# EAGLE board picoBuck-Panel-v10 (EAGLE 6.4), part 1 of 2
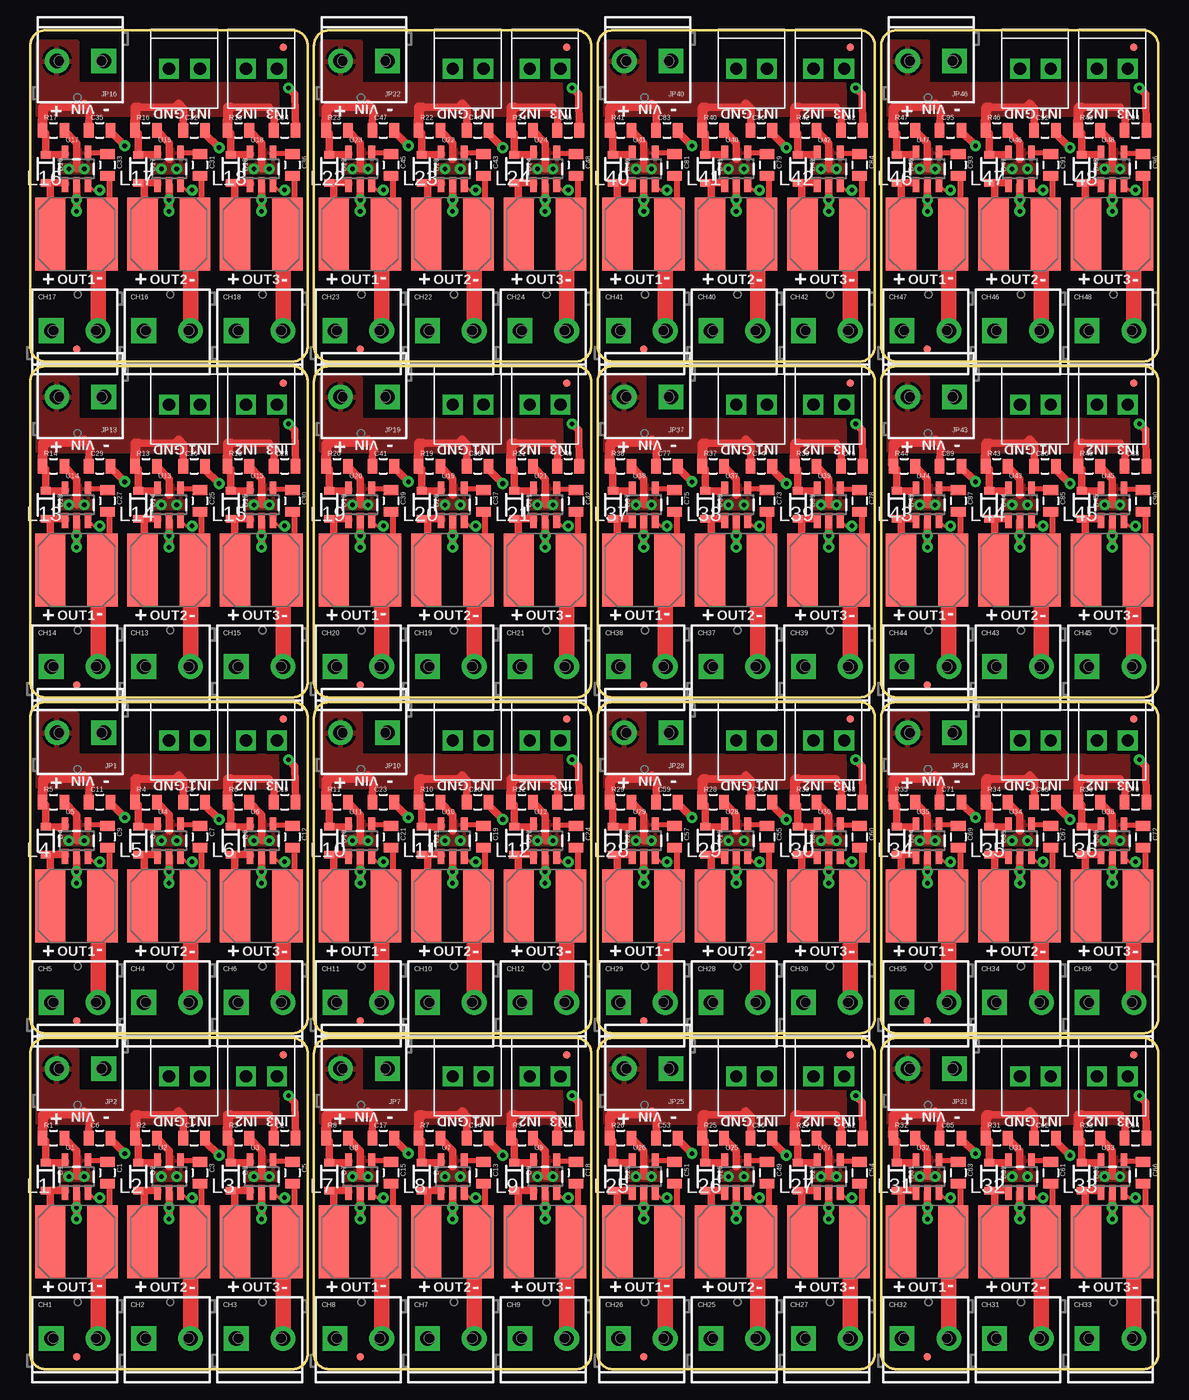
[diagram p0: board, top side]
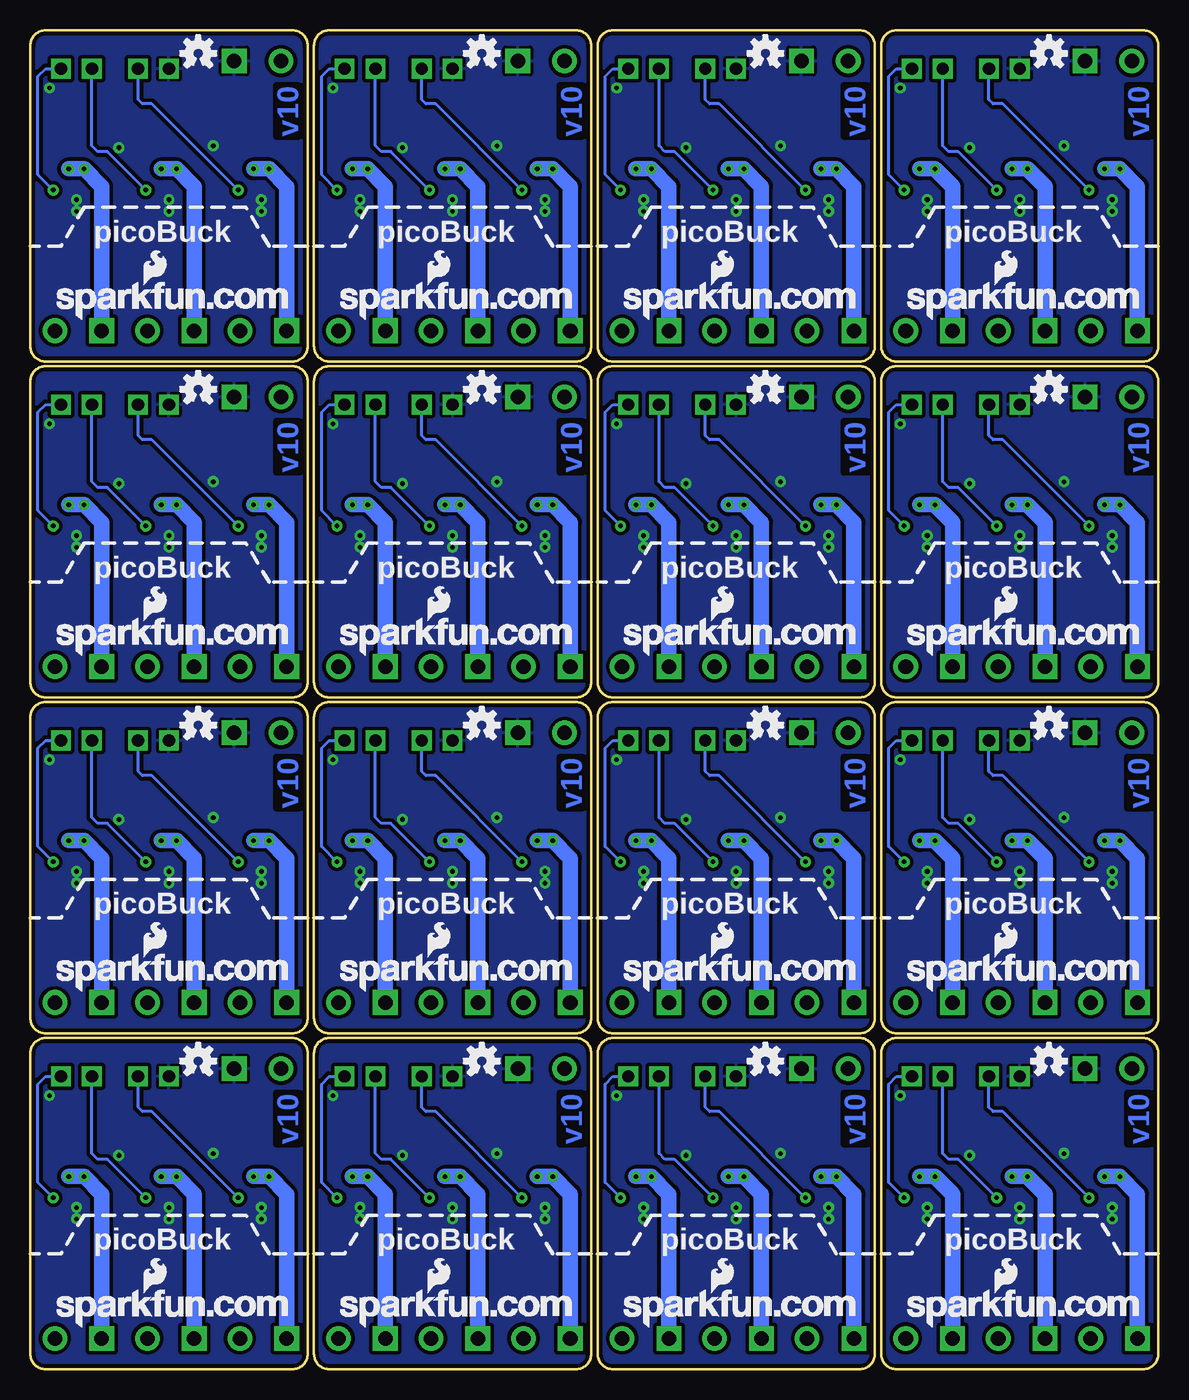
[diagram p1: board, bottom side, seen from below]

Size 92.95 x 110.35 mm. Coordinates in mm from the lower left corner, seen from the top.
Outline: 0,26.02 0,1.27 arc90 1.27,0 21.58,0 arc90 22.85,1.27 22.85,26.02 arc90 21.58,27.3 1.27,27.3 arc90 0,26.02
Outline: 0,53.71 0,28.96 arc90 1.27,27.69 21.58,27.69 arc90 22.85,28.96 22.85,53.71 arc90 21.58,54.98 1.27,54.98 arc90 0,53.71
Outline: 23.37,26.02 23.37,1.27 arc90 24.64,0 44.95,0 arc90 46.22,1.27 46.22,26.02 arc90 44.95,27.3 24.64,27.3 arc90 23.37,26.02
Outline: 23.37,53.71 23.37,28.96 arc90 24.64,27.69 44.95,27.69 arc90 46.22,28.96 46.22,53.71 arc90 44.95,54.98 24.64,54.98 arc90 23.37,53.71
Outline: 0,81.4 0,56.64 arc90 1.27,55.37 21.58,55.37 arc90 22.85,56.64 22.85,81.4 arc90 21.58,82.67 1.27,82.67 arc90 0,81.4
Outline: 0,109.08 0,84.33 arc90 1.27,83.06 21.58,83.06 arc90 22.85,84.33 22.85,109.08 arc90 21.58,110.35 1.27,110.35 arc90 0,109.08
Outline: 23.37,81.4 23.37,56.64 arc90 24.64,55.37 44.95,55.37 arc90 46.22,56.64 46.22,81.4 arc90 44.95,82.67 24.64,82.67 arc90 23.37,81.4
Outline: 23.37,109.08 23.37,84.33 arc90 24.64,83.06 44.95,83.06 arc90 46.22,84.33 46.22,109.08 arc90 44.95,110.35 24.64,110.35 arc90 23.37,109.08
Outline: 46.74,26.02 46.74,1.27 arc90 48.01,0 68.31,0 arc90 69.58,1.27 69.58,26.02 arc90 68.31,27.3 48.01,27.3 arc90 46.74,26.02
Outline: 46.74,53.71 46.74,28.96 arc90 48.01,27.69 68.31,27.69 arc90 69.58,28.96 69.58,53.71 arc90 68.31,54.98 48.01,54.98 arc90 46.74,53.71
Outline: 70.1,26.02 70.1,1.27 arc90 71.37,0 91.68,0 arc90 92.95,1.27 92.95,26.02 arc90 91.68,27.3 71.37,27.3 arc90 70.1,26.02
Outline: 70.1,53.71 70.1,28.96 arc90 71.37,27.69 91.68,27.69 arc90 92.95,28.96 92.95,53.71 arc90 91.68,54.98 71.37,54.98 arc90 70.1,53.71
Outline: 46.74,81.4 46.74,56.64 arc90 48.01,55.37 68.31,55.37 arc90 69.58,56.64 69.58,81.4 arc90 68.31,82.67 48.01,82.67 arc90 46.74,81.4
Outline: 46.74,109.08 46.74,84.33 arc90 48.01,83.06 68.31,83.06 arc90 69.58,84.33 69.58,109.08 arc90 68.31,110.35 48.01,110.35 arc90 46.74,109.08
Outline: 70.1,81.4 70.1,56.64 arc90 71.37,55.37 91.68,55.37 arc90 92.95,56.64 92.95,81.4 arc90 91.68,82.67 71.37,82.67 arc90 70.1,81.4
Outline: 70.1,109.08 70.1,84.33 arc90 71.37,83.06 91.68,83.06 arc90 92.95,84.33 92.95,109.08 arc90 91.68,110.35 71.37,110.35 arc90 70.1,109.08
Copper layers (1*16): Top 0.035mm / dielectric 1.5mm / Bottom 0.035mm
Design rules "Sparkfun": minimum track width 8mil, minimum drill 20mil, track to track 8mil, track to pad 8mil, pad to pad 8mil, via to via 8mil, smd to smd 8mil, copper to edge 8mil, drill to drill 8mil, minimum pad ring 12mil, minimum via ring 10mil, stop-mask expansion 4mil, vias tented up to drill 20mil, thermal gap 10mil
Net classes: 0 default: width 0.254 mm; 1 power: width 0.508 mm

## Footprints (pad centres in the part's own frame; a part is rotated, then mirrored left to right if it is on the bottom)
0805 = smd 0.8 x 1.2: 1 -0.9,0; 2 0.9,0
SCREWTERMINAL-3.5MM-2_LOCK = drill 1.2 pad 2.032 square: 1 -0.178,0 | drill 1.2 pad 2.032: 2 3.678,0
SOD-323 = smd 0.63 x 0.83: 1 -1.15,0; 2 1.15,0
MICRO-FIDUCIAL = smd 0.635 x 0.635: 1 0,0
1X02_2.54_SCREWTERM = drill 1.016 square: P1 2.54,0; P2 0,0
SRN6045 = smd 2.5 x 6: 1 -2.175,-0.175; 2 2.125,-0.175
SOT23-5 = smd 0.55 x 1.2: 1 -0.95,-1.3; 2 0,-1.3; 3 0.95,-1.3; 4 0.95,1.3; 5 -0.95,1.3

## Placement (x,y rotation side)
C1  1uF  [0805]  6.35,16.19 270 top
C2  2.2uF  [0805]  20.95,19.05 0 top
C3  1uF  [0805]  13.97,16.19 270 top
C4  2.2uF  [0805]  13.49,19.05 0 top
C5  1uF  [0805]  21.59,16.19 270 top
C6  2.2uF  [0805]  5.71,19.05 0 top
C7  1uF  [0805]  13.97,43.88 270 top
C8  2.2uF  [0805]  13.49,46.74 0 top
C9  1uF  [0805]  6.35,43.88 270 top
C10  2.2uF  [0805]  20.95,46.74 0 top
C11  2.2uF  [0805]  5.71,46.74 0 top
C12  1uF  [0805]  21.59,43.88 270 top
C13  1uF  [0805]  37.34,16.19 270 top
C14  2.2uF  [0805]  36.86,19.05 0 top
C15  1uF  [0805]  29.72,16.19 270 top
C16  2.2uF  [0805]  44.32,19.05 0 top
C17  2.2uF  [0805]  29.08,19.05 0 top
C18  1uF  [0805]  44.96,16.19 270 top
C19  1uF  [0805]  37.34,43.88 270 top
C20  2.2uF  [0805]  36.86,46.74 0 top
C21  1uF  [0805]  29.72,43.88 270 top
C22  2.2uF  [0805]  44.32,46.74 0 top
C23  2.2uF  [0805]  29.08,46.74 0 top
C24  1uF  [0805]  44.96,43.88 270 top
C25  1uF  [0805]  13.97,71.56 270 top
C26  2.2uF  [0805]  13.49,74.42 0 top
C27  1uF  [0805]  6.35,71.56 270 top
C28  2.2uF  [0805]  20.95,74.42 0 top
C29  2.2uF  [0805]  5.71,74.42 0 top
C30  1uF  [0805]  21.59,71.56 270 top
C31  1uF  [0805]  13.97,99.25 270 top
C32  2.2uF  [0805]  13.49,102.11 0 top
C33  1uF  [0805]  6.35,99.25 270 top
C34  2.2uF  [0805]  20.95,102.11 0 top
C35  2.2uF  [0805]  5.71,102.11 0 top
C36  1uF  [0805]  21.59,99.25 270 top
C37  1uF  [0805]  37.34,71.56 270 top
C38  2.2uF  [0805]  36.86,74.42 0 top
C39  1uF  [0805]  29.72,71.56 270 top
C40  2.2uF  [0805]  44.32,74.42 0 top
C41  2.2uF  [0805]  29.08,74.42 0 top
C42  1uF  [0805]  44.96,71.56 270 top
C43  1uF  [0805]  37.34,99.25 270 top
C44  2.2uF  [0805]  36.86,102.11 0 top
C45  1uF  [0805]  29.72,99.25 270 top
C46  2.2uF  [0805]  44.32,102.11 0 top
C47  2.2uF  [0805]  29.08,102.11 0 top
C48  1uF  [0805]  44.96,99.25 270 top
C49  1uF  [0805]  60.71,16.19 270 top
C50  2.2uF  [0805]  60.23,19.05 0 top
C51  1uF  [0805]  53.09,16.19 270 top
C52  2.2uF  [0805]  67.69,19.05 0 top
C53  2.2uF  [0805]  52.45,19.05 0 top
C54  1uF  [0805]  68.33,16.19 270 top
C55  1uF  [0805]  60.71,43.88 270 top
C56  2.2uF  [0805]  60.23,46.74 0 top
C57  1uF  [0805]  53.09,43.88 270 top
C58  2.2uF  [0805]  67.69,46.74 0 top
C59  2.2uF  [0805]  52.45,46.74 0 top
C60  1uF  [0805]  68.33,43.88 270 top
C61  1uF  [0805]  84.07,16.19 270 top
C62  2.2uF  [0805]  83.6,19.05 0 top
C63  1uF  [0805]  76.45,16.19 270 top
C64  2.2uF  [0805]  91.06,19.05 0 top
C65  2.2uF  [0805]  75.82,19.05 0 top
C66  1uF  [0805]  91.69,16.19 270 top
C67  1uF  [0805]  84.07,43.88 270 top
C68  2.2uF  [0805]  83.6,46.74 0 top
C69  1uF  [0805]  76.45,43.88 270 top
C70  2.2uF  [0805]  91.06,46.74 0 top
C71  2.2uF  [0805]  75.82,46.74 0 top
C72  1uF  [0805]  91.69,43.88 270 top
C73  1uF  [0805]  60.71,71.56 270 top
C74  2.2uF  [0805]  60.23,74.42 0 top
C75  1uF  [0805]  53.09,71.56 270 top
C76  2.2uF  [0805]  67.69,74.42 0 top
C77  2.2uF  [0805]  52.45,74.42 0 top
C78  1uF  [0805]  68.33,71.56 270 top
C79  1uF  [0805]  60.71,99.25 270 top
C80  2.2uF  [0805]  60.23,102.11 0 top
C81  1uF  [0805]  53.09,99.25 270 top
C82  2.2uF  [0805]  67.69,102.11 0 top
C83  2.2uF  [0805]  52.45,102.11 0 top
C84  1uF  [0805]  68.33,99.25 270 top
C85  1uF  [0805]  84.07,71.56 270 top
C86  2.2uF  [0805]  83.6,74.42 0 top
C87  1uF  [0805]  76.45,71.56 270 top
C88  2.2uF  [0805]  91.06,74.42 0 top
C89  2.2uF  [0805]  75.82,74.42 0 top
C90  1uF  [0805]  91.69,71.56 270 top
C91  1uF  [0805]  84.07,99.25 270 top
C92  2.2uF  [0805]  83.6,102.11 0 top
C93  1uF  [0805]  76.45,99.25 270 top
C94  2.2uF  [0805]  91.06,102.11 0 top
C95  2.2uF  [0805]  75.82,102.11 0 top
C96  1uF  [0805]  91.69,99.25 270 top
CH1  [SCREWTERMINAL-3.5MM-2_LOCK]  1.91,2.54 0 top
CH2  [SCREWTERMINAL-3.5MM-2_LOCK]  9.53,2.54 0 top
CH3  [SCREWTERMINAL-3.5MM-2_LOCK]  17.14,2.54 0 top
CH4  [SCREWTERMINAL-3.5MM-2_LOCK]  9.53,30.23 0 top
CH5  [SCREWTERMINAL-3.5MM-2_LOCK]  1.91,30.23 0 top
CH6  [SCREWTERMINAL-3.5MM-2_LOCK]  17.14,30.23 0 top
CH7  [SCREWTERMINAL-3.5MM-2_LOCK]  32.89,2.54 0 top
CH8  [SCREWTERMINAL-3.5MM-2_LOCK]  25.27,2.54 0 top
CH9  [SCREWTERMINAL-3.5MM-2_LOCK]  40.51,2.54 0 top
CH10  [SCREWTERMINAL-3.5MM-2_LOCK]  32.89,30.23 0 top
CH11  [SCREWTERMINAL-3.5MM-2_LOCK]  25.27,30.23 0 top
CH12  [SCREWTERMINAL-3.5MM-2_LOCK]  40.51,30.23 0 top
CH13  [SCREWTERMINAL-3.5MM-2_LOCK]  9.53,57.91 0 top
CH14  [SCREWTERMINAL-3.5MM-2_LOCK]  1.91,57.91 0 top
CH15  [SCREWTERMINAL-3.5MM-2_LOCK]  17.14,57.91 0 top
CH16  [SCREWTERMINAL-3.5MM-2_LOCK]  9.53,85.6 0 top
CH17  [SCREWTERMINAL-3.5MM-2_LOCK]  1.91,85.6 0 top
CH18  [SCREWTERMINAL-3.5MM-2_LOCK]  17.14,85.6 0 top
CH19  [SCREWTERMINAL-3.5MM-2_LOCK]  32.89,57.91 0 top
CH20  [SCREWTERMINAL-3.5MM-2_LOCK]  25.27,57.91 0 top
CH21  [SCREWTERMINAL-3.5MM-2_LOCK]  40.51,57.91 0 top
CH22  [SCREWTERMINAL-3.5MM-2_LOCK]  32.89,85.6 0 top
CH23  [SCREWTERMINAL-3.5MM-2_LOCK]  25.27,85.6 0 top
CH24  [SCREWTERMINAL-3.5MM-2_LOCK]  40.51,85.6 0 top
CH25  [SCREWTERMINAL-3.5MM-2_LOCK]  56.26,2.54 0 top
CH26  [SCREWTERMINAL-3.5MM-2_LOCK]  48.64,2.54 0 top
CH27  [SCREWTERMINAL-3.5MM-2_LOCK]  63.88,2.54 0 top
CH28  [SCREWTERMINAL-3.5MM-2_LOCK]  56.26,30.23 0 top
CH29  [SCREWTERMINAL-3.5MM-2_LOCK]  48.64,30.23 0 top
CH30  [SCREWTERMINAL-3.5MM-2_LOCK]  63.88,30.23 0 top
CH31  [SCREWTERMINAL-3.5MM-2_LOCK]  79.63,2.54 0 top
CH32  [SCREWTERMINAL-3.5MM-2_LOCK]  72.01,2.54 0 top
CH33  [SCREWTERMINAL-3.5MM-2_LOCK]  87.25,2.54 0 top
CH34  [SCREWTERMINAL-3.5MM-2_LOCK]  79.63,30.23 0 top
CH35  [SCREWTERMINAL-3.5MM-2_LOCK]  72.01,30.23 0 top
CH36  [SCREWTERMINAL-3.5MM-2_LOCK]  87.25,30.23 0 top
CH37  [SCREWTERMINAL-3.5MM-2_LOCK]  56.26,57.91 0 top
CH38  [SCREWTERMINAL-3.5MM-2_LOCK]  48.64,57.91 0 top
CH39  [SCREWTERMINAL-3.5MM-2_LOCK]  63.88,57.91 0 top
CH40  [SCREWTERMINAL-3.5MM-2_LOCK]  56.26,85.6 0 top
CH41  [SCREWTERMINAL-3.5MM-2_LOCK]  48.64,85.6 0 top
CH42  [SCREWTERMINAL-3.5MM-2_LOCK]  63.88,85.6 0 top
CH43  [SCREWTERMINAL-3.5MM-2_LOCK]  79.63,57.91 0 top
CH44  [SCREWTERMINAL-3.5MM-2_LOCK]  72.01,57.91 0 top
CH45  [SCREWTERMINAL-3.5MM-2_LOCK]  87.25,57.91 0 top
CH46  [SCREWTERMINAL-3.5MM-2_LOCK]  79.63,85.6 0 top
CH47  [SCREWTERMINAL-3.5MM-2_LOCK]  72.01,85.6 0 top
CH48  [SCREWTERMINAL-3.5MM-2_LOCK]  87.25,85.6 0 top
D1  BAT20JFILM  [SOD-323]  1.27,15.88 270 top
D2  BAT20JFILM  [SOD-323]  8.89,15.88 270 top
D3  BAT20JFILM  [SOD-323]  16.51,15.88 270 top
D4  BAT20JFILM  [SOD-323]  1.27,43.56 270 top
D5  BAT20JFILM  [SOD-323]  8.89,43.56 270 top
D6  BAT20JFILM  [SOD-323]  16.51,43.56 270 top
D7  BAT20JFILM  [SOD-323]  24.64,15.88 270 top
D8  BAT20JFILM  [SOD-323]  32.26,15.88 270 top
D9  BAT20JFILM  [SOD-323]  39.88,15.88 270 top
D10  BAT20JFILM  [SOD-323]  24.64,43.56 270 top
D11  BAT20JFILM  [SOD-323]  32.26,43.56 270 top
D12  BAT20JFILM  [SOD-323]  39.88,43.56 270 top
D13  BAT20JFILM  [SOD-323]  1.27,71.25 270 top
D14  BAT20JFILM  [SOD-323]  8.89,71.25 270 top
D15  BAT20JFILM  [SOD-323]  16.51,71.25 270 top
D16  BAT20JFILM  [SOD-323]  1.27,98.93 270 top
D17  BAT20JFILM  [SOD-323]  8.89,98.93 270 top
D18  BAT20JFILM  [SOD-323]  16.51,98.93 270 top
D19  BAT20JFILM  [SOD-323]  24.64,71.25 270 top
D20  BAT20JFILM  [SOD-323]  32.26,71.25 270 top
D21  BAT20JFILM  [SOD-323]  39.88,71.25 270 top
D22  BAT20JFILM  [SOD-323]  24.64,98.93 270 top
D23  BAT20JFILM  [SOD-323]  32.26,98.93 270 top
D24  BAT20JFILM  [SOD-323]  39.88,98.93 270 top
D25  BAT20JFILM  [SOD-323]  48.01,15.88 270 top
D26  BAT20JFILM  [SOD-323]  55.63,15.88 270 top
D27  BAT20JFILM  [SOD-323]  63.25,15.88 270 top
D28  BAT20JFILM  [SOD-323]  48.01,43.56 270 top
D29  BAT20JFILM  [SOD-323]  55.63,43.56 270 top
D30  BAT20JFILM  [SOD-323]  63.25,43.56 270 top
D31  BAT20JFILM  [SOD-323]  71.37,15.88 270 top
D32  BAT20JFILM  [SOD-323]  78.99,15.88 270 top
D33  BAT20JFILM  [SOD-323]  86.61,15.88 270 top
D34  BAT20JFILM  [SOD-323]  71.37,43.56 270 top
D35  BAT20JFILM  [SOD-323]  78.99,43.56 270 top
D36  BAT20JFILM  [SOD-323]  86.61,43.56 270 top
D37  BAT20JFILM  [SOD-323]  48.01,71.25 270 top
D38  BAT20JFILM  [SOD-323]  55.63,71.25 270 top
D39  BAT20JFILM  [SOD-323]  63.25,71.25 270 top
D40  BAT20JFILM  [SOD-323]  48.01,98.93 270 top
D41  BAT20JFILM  [SOD-323]  55.63,98.93 270 top
D42  BAT20JFILM  [SOD-323]  63.25,98.93 270 top
D43  BAT20JFILM  [SOD-323]  71.37,71.25 270 top
D44  BAT20JFILM  [SOD-323]  78.99,71.25 270 top
D45  BAT20JFILM  [SOD-323]  86.61,71.25 270 top
D46  BAT20JFILM  [SOD-323]  71.37,98.93 270 top
D47  BAT20JFILM  [SOD-323]  78.99,98.93 270 top
D48  BAT20JFILM  [SOD-323]  86.61,98.93 270 top
FID1  FIDUCIALUFIDUCIAL  [MICRO-FIDUCIAL]  3.81,1.02 0 top
FID2  FIDUCIALUFIDUCIAL  [MICRO-FIDUCIAL]  20.83,25.91 0 top
FID3  FIDUCIALUFIDUCIAL  [MICRO-FIDUCIAL]  3.81,28.7 0 top
FID4  FIDUCIALUFIDUCIAL  [MICRO-FIDUCIAL]  20.83,53.59 0 top
FID5  FIDUCIALUFIDUCIAL  [MICRO-FIDUCIAL]  27.18,1.02 0 top
FID6  FIDUCIALUFIDUCIAL  [MICRO-FIDUCIAL]  44.2,25.91 0 top
FID7  FIDUCIALUFIDUCIAL  [MICRO-FIDUCIAL]  27.18,28.7 0 top
FID8  FIDUCIALUFIDUCIAL  [MICRO-FIDUCIAL]  44.2,53.59 0 top
FID9  FIDUCIALUFIDUCIAL  [MICRO-FIDUCIAL]  3.81,56.39 0 top
FID10  FIDUCIALUFIDUCIAL  [MICRO-FIDUCIAL]  20.83,81.28 0 top
FID11  FIDUCIALUFIDUCIAL  [MICRO-FIDUCIAL]  3.81,84.07 0 top
FID12  FIDUCIALUFIDUCIAL  [MICRO-FIDUCIAL]  20.83,108.97 0 top
FID13  FIDUCIALUFIDUCIAL  [MICRO-FIDUCIAL]  27.18,56.39 0 top
FID14  FIDUCIALUFIDUCIAL  [MICRO-FIDUCIAL]  44.2,81.28 0 top
FID15  FIDUCIALUFIDUCIAL  [MICRO-FIDUCIAL]  27.18,84.07 0 top
FID16  FIDUCIALUFIDUCIAL  [MICRO-FIDUCIAL]  44.2,108.97 0 top
FID17  FIDUCIALUFIDUCIAL  [MICRO-FIDUCIAL]  50.55,1.02 0 top
FID18  FIDUCIALUFIDUCIAL  [MICRO-FIDUCIAL]  67.56,25.91 0 top
FID19  FIDUCIALUFIDUCIAL  [MICRO-FIDUCIAL]  50.55,28.7 0 top
FID20  FIDUCIALUFIDUCIAL  [MICRO-FIDUCIAL]  67.56,53.59 0 top
FID21  FIDUCIALUFIDUCIAL  [MICRO-FIDUCIAL]  73.91,1.02 0 top
FID22  FIDUCIALUFIDUCIAL  [MICRO-FIDUCIAL]  90.93,25.91 0 top
FID23  FIDUCIALUFIDUCIAL  [MICRO-FIDUCIAL]  73.91,28.7 0 top
FID24  FIDUCIALUFIDUCIAL  [MICRO-FIDUCIAL]  90.93,53.59 0 top
FID25  FIDUCIALUFIDUCIAL  [MICRO-FIDUCIAL]  50.55,56.39 0 top
FID26  FIDUCIALUFIDUCIAL  [MICRO-FIDUCIAL]  67.56,81.28 0 top
FID27  FIDUCIALUFIDUCIAL  [MICRO-FIDUCIAL]  50.55,84.07 0 top
FID28  FIDUCIALUFIDUCIAL  [MICRO-FIDUCIAL]  67.56,108.97 0 top
FID29  FIDUCIALUFIDUCIAL  [MICRO-FIDUCIAL]  73.91,56.39 0 top
FID30  FIDUCIALUFIDUCIAL  [MICRO-FIDUCIAL]  90.93,81.28 0 top
FID31  FIDUCIALUFIDUCIAL  [MICRO-FIDUCIAL]  73.91,84.07 0 top
FID32  FIDUCIALUFIDUCIAL  [MICRO-FIDUCIAL]  90.93,108.97 0 top
JP1  [SCREWTERMINAL-3.5MM-2_LOCK]  5.87,52.45 180 top
JP2  [SCREWTERMINAL-3.5MM-2_LOCK]  5.87,24.77 180 top
JP3  M022.54MM_SCREWTERM  [1X02_2.54_SCREWTERM]  17.78,24.13 0 top
JP4  M022.54MM_SCREWTERM  [1X02_2.54_SCREWTERM]  11.43,24.13 0 top
JP5  M022.54MM_SCREWTERM  [1X02_2.54_SCREWTERM]  17.78,51.82 0 top
JP6  M022.54MM_SCREWTERM  [1X02_2.54_SCREWTERM]  11.43,51.82 0 top
JP7  [SCREWTERMINAL-3.5MM-2_LOCK]  29.24,24.77 180 top
JP8  M022.54MM_SCREWTERM  [1X02_2.54_SCREWTERM]  41.15,24.13 0 top
JP9  M022.54MM_SCREWTERM  [1X02_2.54_SCREWTERM]  34.8,24.13 0 top
JP10  [SCREWTERMINAL-3.5MM-2_LOCK]  29.24,52.45 180 top
JP11  M022.54MM_SCREWTERM  [1X02_2.54_SCREWTERM]  41.15,51.82 0 top
JP12  M022.54MM_SCREWTERM  [1X02_2.54_SCREWTERM]  34.8,51.82 0 top
JP13  [SCREWTERMINAL-3.5MM-2_LOCK]  5.87,80.14 180 top
JP14  M022.54MM_SCREWTERM  [1X02_2.54_SCREWTERM]  17.78,79.5 0 top
JP15  M022.54MM_SCREWTERM  [1X02_2.54_SCREWTERM]  11.43,79.5 0 top
JP16  [SCREWTERMINAL-3.5MM-2_LOCK]  5.87,107.82 180 top
JP17  M022.54MM_SCREWTERM  [1X02_2.54_SCREWTERM]  17.78,107.19 0 top
JP18  M022.54MM_SCREWTERM  [1X02_2.54_SCREWTERM]  11.43,107.19 0 top
JP19  [SCREWTERMINAL-3.5MM-2_LOCK]  29.24,80.14 180 top
JP20  M022.54MM_SCREWTERM  [1X02_2.54_SCREWTERM]  41.15,79.5 0 top
JP21  M022.54MM_SCREWTERM  [1X02_2.54_SCREWTERM]  34.8,79.5 0 top
JP22  [SCREWTERMINAL-3.5MM-2_LOCK]  29.24,107.82 180 top
JP23  M022.54MM_SCREWTERM  [1X02_2.54_SCREWTERM]  41.15,107.19 0 top
JP24  M022.54MM_SCREWTERM  [1X02_2.54_SCREWTERM]  34.8,107.19 0 top
JP25  [SCREWTERMINAL-3.5MM-2_LOCK]  52.61,24.77 180 top
JP26  M022.54MM_SCREWTERM  [1X02_2.54_SCREWTERM]  64.52,24.13 0 top
JP27  M022.54MM_SCREWTERM  [1X02_2.54_SCREWTERM]  58.17,24.13 0 top
JP28  [SCREWTERMINAL-3.5MM-2_LOCK]  52.61,52.45 180 top
JP29  M022.54MM_SCREWTERM  [1X02_2.54_SCREWTERM]  64.52,51.82 0 top
JP30  M022.54MM_SCREWTERM  [1X02_2.54_SCREWTERM]  58.17,51.82 0 top
JP31  [SCREWTERMINAL-3.5MM-2_LOCK]  75.98,24.77 180 top
JP32  M022.54MM_SCREWTERM  [1X02_2.54_SCREWTERM]  87.88,24.13 0 top
JP33  M022.54MM_SCREWTERM  [1X02_2.54_SCREWTERM]  81.53,24.13 0 top
JP34  [SCREWTERMINAL-3.5MM-2_LOCK]  75.98,52.45 180 top
JP35  M022.54MM_SCREWTERM  [1X02_2.54_SCREWTERM]  87.88,51.82 0 top
JP36  M022.54MM_SCREWTERM  [1X02_2.54_SCREWTERM]  81.53,51.82 0 top
JP37  [SCREWTERMINAL-3.5MM-2_LOCK]  52.61,80.14 180 top
JP38  M022.54MM_SCREWTERM  [1X02_2.54_SCREWTERM]  64.52,79.5 0 top
JP39  M022.54MM_SCREWTERM  [1X02_2.54_SCREWTERM]  58.17,79.5 0 top
JP40  [SCREWTERMINAL-3.5MM-2_LOCK]  52.61,107.82 180 top
JP41  M022.54MM_SCREWTERM  [1X02_2.54_SCREWTERM]  64.52,107.19 0 top
JP42  M022.54MM_SCREWTERM  [1X02_2.54_SCREWTERM]  58.17,107.19 0 top
JP43  [SCREWTERMINAL-3.5MM-2_LOCK]  75.98,80.14 180 top
JP44  M022.54MM_SCREWTERM  [1X02_2.54_SCREWTERM]  87.88,79.5 0 top
JP45  M022.54MM_SCREWTERM  [1X02_2.54_SCREWTERM]  81.53,79.5 0 top
JP46  [SCREWTERMINAL-3.5MM-2_LOCK]  75.98,107.82 180 top
JP47  M022.54MM_SCREWTERM  [1X02_2.54_SCREWTERM]  87.88,107.19 0 top
JP48  M022.54MM_SCREWTERM  [1X02_2.54_SCREWTERM]  81.53,107.19 0 top
L1  33uH  [SRN6045]  3.81,10.67 0 top
L2  33uH  [SRN6045]  11.43,10.67 0 top
L3  33uH  [SRN6045]  19.05,10.67 0 top
L4  33uH  [SRN6045]  3.81,38.35 0 top
L5  33uH  [SRN6045]  11.43,38.35 0 top
L6  33uH  [SRN6045]  19.05,38.35 0 top
L7  33uH  [SRN6045]  27.18,10.67 0 top
L8  33uH  [SRN6045]  34.8,10.67 0 top
L9  33uH  [SRN6045]  42.42,10.67 0 top
L10  33uH  [SRN6045]  27.18,38.35 0 top
L11  33uH  [SRN6045]  34.8,38.35 0 top
L12  33uH  [SRN6045]  42.42,38.35 0 top
L13  33uH  [SRN6045]  3.81,66.04 0 top
L14  33uH  [SRN6045]  11.43,66.04 0 top
L15  33uH  [SRN6045]  19.05,66.04 0 top
L16  33uH  [SRN6045]  3.81,93.73 0 top
L17  33uH  [SRN6045]  11.43,93.73 0 top
L18  33uH  [SRN6045]  19.05,93.73 0 top
L19  33uH  [SRN6045]  27.18,66.04 0 top
L20  33uH  [SRN6045]  34.8,66.04 0 top
L21  33uH  [SRN6045]  42.42,66.04 0 top
L22  33uH  [SRN6045]  27.18,93.73 0 top
L23  33uH  [SRN6045]  34.8,93.73 0 top
L24  33uH  [SRN6045]  42.42,93.73 0 top
L25  33uH  [SRN6045]  50.55,10.67 0 top
L26  33uH  [SRN6045]  58.17,10.67 0 top
L27  33uH  [SRN6045]  65.79,10.67 0 top
L28  33uH  [SRN6045]  50.55,38.35 0 top
L29  33uH  [SRN6045]  58.17,38.35 0 top
L30  33uH  [SRN6045]  65.79,38.35 0 top
L31  33uH  [SRN6045]  73.91,10.67 0 top
L32  33uH  [SRN6045]  81.53,10.67 0 top
L33  33uH  [SRN6045]  89.15,10.67 0 top
L34  33uH  [SRN6045]  73.91,38.35 0 top
L35  33uH  [SRN6045]  81.53,38.35 0 top
L36  33uH  [SRN6045]  89.15,38.35 0 top
L37  33uH  [SRN6045]  50.55,66.04 0 top
L38  33uH  [SRN6045]  58.17,66.04 0 top
L39  33uH  [SRN6045]  65.79,66.04 0 top
L40  33uH  [SRN6045]  50.55,93.73 0 top
L41  33uH  [SRN6045]  58.17,93.73 0 top
L42  33uH  [SRN6045]  65.79,93.73 0 top
L43  33uH  [SRN6045]  73.91,66.04 0 top
L44  33uH  [SRN6045]  81.53,66.04 0 top
L45  33uH  [SRN6045]  89.15,66.04 0 top
L46  33uH  [SRN6045]  73.91,93.73 0 top
L47  33uH  [SRN6045]  81.53,93.73 0 top
L48  33uH  [SRN6045]  89.15,93.73 0 top
LOGO1  OSHW-LOGOS  [OSHW-LOGO-S]  9.02,25.4 0 bottom
LOGO2  LOGO-SFENEW  [SFE-NEW-WEBLOGO]  20.7,3.43 0 bottom
LOGO3  OSHW-LOGOS  [OSHW-LOGO-S]  9.02,53.09 0 bottom
LOGO4  LOGO-SFENEW  [SFE-NEW-WEBLOGO]  20.7,31.11 0 bottom
LOGO5  OSHW-LOGOS  [OSHW-LOGO-S]  32.38,25.4 0 bottom
LOGO6  LOGO-SFENEW  [SFE-NEW-WEBLOGO]  44.07,3.43 0 bottom
LOGO7  OSHW-LOGOS  [OSHW-LOGO-S]  32.38,53.09 0 bottom
LOGO8  LOGO-SFENEW  [SFE-NEW-WEBLOGO]  44.07,31.11 0 bottom
LOGO9  OSHW-LOGOS  [OSHW-LOGO-S]  9.02,80.77 0 bottom
LOGO10  LOGO-SFENEW  [SFE-NEW-WEBLOGO]  20.7,58.8 0 bottom
LOGO11  OSHW-LOGOS  [OSHW-LOGO-S]  9.02,108.46 0 bottom
LOGO12  LOGO-SFENEW  [SFE-NEW-WEBLOGO]  20.7,86.49 0 bottom
LOGO13  OSHW-LOGOS  [OSHW-LOGO-S]  32.38,80.77 0 bottom
LOGO14  LOGO-SFENEW  [SFE-NEW-WEBLOGO]  44.07,58.8 0 bottom
LOGO15  OSHW-LOGOS  [OSHW-LOGO-S]  32.38,108.46 0 bottom
LOGO16  LOGO-SFENEW  [SFE-NEW-WEBLOGO]  44.07,86.49 0 bottom
LOGO17  OSHW-LOGOS  [OSHW-LOGO-S]  55.75,25.4 0 bottom
LOGO18  LOGO-SFENEW  [SFE-NEW-WEBLOGO]  67.44,3.43 0 bottom
LOGO19  OSHW-LOGOS  [OSHW-LOGO-S]  55.75,53.09 0 bottom
LOGO20  LOGO-SFENEW  [SFE-NEW-WEBLOGO]  67.44,31.11 0 bottom
LOGO21  OSHW-LOGOS  [OSHW-LOGO-S]  79.12,25.4 0 bottom
LOGO22  LOGO-SFENEW  [SFE-NEW-WEBLOGO]  90.81,3.43 0 bottom
LOGO23  OSHW-LOGOS  [OSHW-LOGO-S]  79.12,53.09 0 bottom
LOGO24  LOGO-SFENEW  [SFE-NEW-WEBLOGO]  90.81,31.11 0 bottom
LOGO25  OSHW-LOGOS  [OSHW-LOGO-S]  55.75,80.77 0 bottom
LOGO26  LOGO-SFENEW  [SFE-NEW-WEBLOGO]  67.44,58.8 0 bottom
LOGO27  OSHW-LOGOS  [OSHW-LOGO-S]  55.75,108.46 0 bottom
LOGO28  LOGO-SFENEW  [SFE-NEW-WEBLOGO]  67.44,86.49 0 bottom
LOGO29  OSHW-LOGOS  [OSHW-LOGO-S]  79.12,80.77 0 bottom
LOGO30  LOGO-SFENEW  [SFE-NEW-WEBLOGO]  90.81,58.8 0 bottom
LOGO31  OSHW-LOGOS  [OSHW-LOGO-S]  79.12,108.46 0 bottom
LOGO32  LOGO-SFENEW  [SFE-NEW-WEBLOGO]  90.81,86.49 0 bottom
R1  0.3R  [0805]  1.91,19.05 0 top
R2  0.3R  [0805]  9.53,19.05 0 top
R3  0.3R  [0805]  17.14,19.05 0 top
R4  0.3R  [0805]  9.53,46.74 0 top
R5  0.3R  [0805]  1.91,46.74 0 top
R6  0.3R  [0805]  17.14,46.74 0 top
R7  0.3R  [0805]  32.89,19.05 0 top
R8  0.3R  [0805]  25.27,19.05 0 top
R9  0.3R  [0805]  40.51,19.05 0 top
R10  0.3R  [0805]  32.89,46.74 0 top
R11  0.3R  [0805]  25.27,46.74 0 top
R12  0.3R  [0805]  40.51,46.74 0 top
R13  0.3R  [0805]  9.53,74.42 0 top
R14  0.3R  [0805]  1.91,74.42 0 top
R15  0.3R  [0805]  17.14,74.42 0 top
R16  0.3R  [0805]  9.53,102.11 0 top
R17  0.3R  [0805]  1.91,102.11 0 top
R18  0.3R  [0805]  17.14,102.11 0 top
R19  0.3R  [0805]  32.89,74.42 0 top
R20  0.3R  [0805]  25.27,74.42 0 top
R21  0.3R  [0805]  40.51,74.42 0 top
R22  0.3R  [0805]  32.89,102.11 0 top
R23  0.3R  [0805]  25.27,102.11 0 top
R24  0.3R  [0805]  40.51,102.11 0 top
R25  0.3R  [0805]  56.26,19.05 0 top
R26  0.3R  [0805]  48.64,19.05 0 top
R27  0.3R  [0805]  63.88,19.05 0 top
R28  0.3R  [0805]  56.26,46.74 0 top
R29  0.3R  [0805]  48.64,46.74 0 top
R30  0.3R  [0805]  63.88,46.74 0 top
R31  0.3R  [0805]  79.63,19.05 0 top
R32  0.3R  [0805]  72.01,19.05 0 top
R33  0.3R  [0805]  87.25,19.05 0 top
R34  0.3R  [0805]  79.63,46.74 0 top
R35  0.3R  [0805]  72.01,46.74 0 top
R36  0.3R  [0805]  87.25,46.74 0 top
R37  0.3R  [0805]  56.26,74.42 0 top
R38  0.3R  [0805]  48.64,74.42 0 top
R39  0.3R  [0805]  63.88,74.42 0 top
R40  0.3R  [0805]  56.26,102.11 0 top
R41  0.3R  [0805]  48.64,102.11 0 top
R42  0.3R  [0805]  63.88,102.11 0 top
R43  0.3R  [0805]  79.63,74.42 0 top
R44  0.3R  [0805]  72.01,74.42 0 top
R45  0.3R  [0805]  87.25,74.42 0 top
R46  0.3R  [0805]  79.63,102.11 0 top
R47  0.3R  [0805]  72.01,102.11 0 top
R48  0.3R  [0805]  87.25,102.11 0 top
U1  [SOT23-5]  3.81,15.88 0 top
U2  [SOT23-5]  11.43,15.88 0 top
U3  [SOT23-5]  19.05,15.88 0 top
U4  [SOT23-5]  11.43,43.56 0 top
U5  [SOT23-5]  3.81,43.56 0 top
U6  [SOT23-5]  19.05,43.56 0 top
U7  [SOT23-5]  34.8,15.88 0 top
U8  [SOT23-5]  27.18,15.88 0 top
U9  [SOT23-5]  42.42,15.88 0 top
U10  [SOT23-5]  34.8,43.56 0 top
U11  [SOT23-5]  27.18,43.56 0 top
U12  [SOT23-5]  42.42,43.56 0 top
U13  [SOT23-5]  11.43,71.25 0 top
U14  [SOT23-5]  3.81,71.25 0 top
U15  [SOT23-5]  19.05,71.25 0 top
U16  [SOT23-5]  11.43,98.93 0 top
U17  [SOT23-5]  3.81,98.93 0 top
U18  [SOT23-5]  19.05,98.93 0 top
U19  [SOT23-5]  34.8,71.25 0 top
U20  [SOT23-5]  27.18,71.25 0 top
U21  [SOT23-5]  42.42,71.25 0 top
U22  [SOT23-5]  34.8,98.93 0 top
U23  [SOT23-5]  27.18,98.93 0 top
U24  [SOT23-5]  42.42,98.93 0 top
U25  [SOT23-5]  58.17,15.88 0 top
U26  [SOT23-5]  50.55,15.88 0 top
U27  [SOT23-5]  65.79,15.88 0 top
U28  [SOT23-5]  58.17,43.56 0 top
U29  [SOT23-5]  50.55,43.56 0 top
U30  [SOT23-5]  65.79,43.56 0 top
U31  [SOT23-5]  81.53,15.88 0 top
U32  [SOT23-5]  73.91,15.88 0 top
U33  [SOT23-5]  89.15,15.88 0 top
U34  [SOT23-5]  81.53,43.56 0 top
U35  [SOT23-5]  73.91,43.56 0 top
U36  [SOT23-5]  89.15,43.56 0 top
U37  [SOT23-5]  58.17,71.25 0 top
U38  [SOT23-5]  50.55,71.25 0 top
U39  [SOT23-5]  65.79,71.25 0 top
U40  [SOT23-5]  58.17,98.93 0 top
U41  [SOT23-5]  50.55,98.93 0 top
U42  [SOT23-5]  65.79,98.93 0 top
U43  [SOT23-5]  81.53,71.25 0 top
U44  [SOT23-5]  73.91,71.25 0 top
U45  [SOT23-5]  89.15,71.25 0 top
U46  [SOT23-5]  81.53,98.93 0 top
U47  [SOT23-5]  73.91,98.93 0 top
U48  [SOT23-5]  89.15,98.93 0 top

## Library data of the parts
C1 C3 C5 C7 C9 C12 C13 C15 C18 C19 C21 C24 C25 C27 C30 C31 C33 C36 C37 C39 C42 C43 C45 C48 C49 C51 C54 C55 C57 C60 C61 C63 C66 C67 C69 C72 C73 C75 C78 C79 C81 C84 C85 C87 C90 C91 C93 C96 = SparkFun-Capacitors; PROD_ID: CAP-11625; VALUE: 1.0uF
C2 C4 C6 C8 C10 C11 C14 C16 C17 C20 C22 C23 C26 C28 C29 C32 C34 C35 C38 C40 C41 C44 C46 C47 C50 C52 C53 C56 C58 C59 C62 C64 C65 C68 C70 C71 C74 C76 C77 C80 C82 C83 C86 C88 C89 C92 C94 C95 = SparkFun-Capacitors; PROD_ID: CAP-11624
CH1-CH48 JP1 JP2 JP7 JP10 JP13 JP16 JP19 JP22 JP25 JP28 JP31 JP34 JP37 JP40 JP43 JP46 = SparkFun
D1-D48 = SparkFun-DiscreteSemi; PROD_ID: DIO-11623
FID1-FID32 LOGO1-LOGO32 = SparkFun-Aesthetics
JP3-JP6 JP8 JP9 JP11 JP12 JP14 JP15 JP17 JP18 JP20 JP21 JP23 JP24 JP26 JP27 JP29 JP30 JP32 JP33 JP35 JP36 JP38 JP39 JP41 JP42 JP44 JP45 JP47 JP48 = SparkFun-Connectors
L1-L48 = SparkFun-Passives; PROD_ID: NDUC-11627
R1-R48 = SparkFun-Resistors; PROD_ID: RES-11622; VALUE: 0.3
U1-U48 = SparkFun-PowerIC; PROD_ID: IC-11626; VALUE: AL8805WS

## Nets
CTRL_CH1: JP4.P1 U1.3
CTRL_CH2: JP3.P2 U2.3
CTRL_CH3: JP3.P1 U3.3
CTRL_CH4: JP6.P1 U5.3
CTRL_CH5: JP5.P2 U4.3
CTRL_CH6: JP5.P1 U6.3
CTRL_CH7: JP9.P1 U8.3
CTRL_CH8: JP8.P2 U7.3
CTRL_CH9: JP8.P1 U9.3
CTRL_CH10: JP12.P1 U11.3
CTRL_CH11: JP11.P2 U10.3
CTRL_CH12: JP11.P1 U12.3
CTRL_CH13: JP15.P1 U14.3
CTRL_CH14: JP14.P2 U13.3
CTRL_CH15: JP14.P1 U15.3
CTRL_CH16: JP18.P1 U17.3
CTRL_CH17: JP17.P2 U16.3
CTRL_CH18: JP17.P1 U18.3
CTRL_CH19: JP21.P1 U20.3
CTRL_CH20: JP20.P2 U19.3
CTRL_CH21: JP20.P1 U21.3
CTRL_CH22: JP24.P1 U23.3
CTRL_CH23: JP23.P2 U22.3
CTRL_CH24: JP23.P1 U24.3
CTRL_CH25: JP27.P1 U26.3
CTRL_CH26: JP26.P2 U25.3
CTRL_CH27: JP26.P1 U27.3
CTRL_CH28: JP30.P1 U29.3
CTRL_CH29: JP29.P2 U28.3
CTRL_CH30: JP29.P1 U30.3
CTRL_CH31: JP33.P1 U32.3
CTRL_CH32: JP32.P2 U31.3
CTRL_CH33: JP32.P1 U33.3
CTRL_CH34: JP36.P1 U35.3
CTRL_CH35: JP35.P2 U34.3
CTRL_CH36: JP35.P1 U36.3
CTRL_CH37: JP39.P1 U38.3
CTRL_CH38: JP38.P2 U37.3
CTRL_CH39: JP38.P1 U39.3
CTRL_CH40: JP42.P1 U41.3
CTRL_CH41: JP41.P2 U40.3
CTRL_CH42: JP41.P1 U42.3
CTRL_CH43: JP45.P1 U44.3
CTRL_CH44: JP44.P2 U43.3
CTRL_CH45: JP44.P1 U45.3
CTRL_CH46: JP48.P1 U47.3
CTRL_CH47: JP47.P2 U46.3
CTRL_CH48: JP47.P1 U48.3
GND: C2.2 C4.2 C6.2 JP2.1 JP4.P2 U1.2 U2.2 U3.2
GND1: C8.2 C10.2 C11.2 JP1.1 JP6.P2 U4.2 U5.2 U6.2
GND2: C14.2 C16.2 C17.2 JP7.1 JP9.P2 U7.2 U8.2 U9.2
GND3: C20.2 C22.2 C23.2 JP10.1 JP12.P2 U10.2 U11.2 U12.2
GND4: C26.2 C28.2 C29.2 JP13.1 JP15.P2 U13.2 U14.2 U15.2
GND5: C32.2 C34.2 C35.2 JP16.1 JP18.P2 U16.2 U17.2 U18.2
GND6: C38.2 C40.2 C41.2 JP19.1 JP21.P2 U19.2 U20.2 U21.2
GND7: C44.2 C46.2 C47.2 JP22.1 JP24.P2 U22.2 U23.2 U24.2
GND8: C50.2 C52.2 C53.2 JP25.1 JP27.P2 U25.2 U26.2 U27.2
GND9: C56.2 C58.2 C59.2 JP28.1 JP30.P2 U28.2 U29.2 U30.2
GND10: C62.2 C64.2 C65.2 JP31.1 JP33.P2 U31.2 U32.2 U33.2
GND11: C68.2 C70.2 C71.2 JP34.1 JP36.P2 U34.2 U35.2 U36.2
GND12: C74.2 C76.2 C77.2 JP37.1 JP39.P2 U37.2 U38.2 U39.2
GND13: C80.2 C82.2 C83.2 JP40.1 JP42.P2 U40.2 U41.2 U42.2
GND14: C86.2 C88.2 C89.2 JP43.1 JP45.P2 U43.2 U44.2 U45.2
GND15: C92.2 C94.2 C95.2 JP46.1 JP48.P2 U46.2 U47.2 U48.2
IND1-1: D1.2 L1.1 U1.1
IND1-2: D4.2 L4.1 U5.1
IND1-3: D7.2 L7.1 U8.1
IND1-4: D10.2 L10.1 U11.1
IND1-5: D13.2 L13.1 U14.1
IND1-6: D16.2 L16.1 U17.1
IND1-7: D19.2 L19.1 U20.1
IND1-8: D22.2 L22.1 U23.1
IND1-9: D25.2 L25.1 U26.1
IND1-10: D28.2 L28.1 U29.1
IND1-11: D31.2 L31.1 U32.1
IND1-12: D34.2 L34.1 U35.1
IND1-13: D37.2 L37.1 U38.1
IND1-14: D40.2 L40.1 U41.1
IND1-15: D43.2 L43.1 U44.1
IND1-16: D46.2 L46.1 U47.1
IND2-1: D2.2 L2.1 U2.1
IND2-2: D5.2 L5.1 U4.1
IND2-3: D8.2 L8.1 U7.1
IND2-4: D11.2 L11.1 U10.1
IND2-5: D14.2 L14.1 U13.1
IND2-6: D17.2 L17.1 U16.1
IND2-7: D20.2 L20.1 U19.1
IND2-8: D23.2 L23.1 U22.1
IND2-9: D26.2 L26.1 U25.1
IND2-10: D29.2 L29.1 U28.1
IND2-11: D32.2 L32.1 U31.1
IND2-12: D35.2 L35.1 U34.1
IND2-13: D38.2 L38.1 U37.1
IND2-14: D41.2 L41.1 U40.1
IND2-15: D44.2 L44.1 U43.1
IND2-16: D47.2 L47.1 U46.1
IND3-1: D3.2 L3.1 U3.1
IND3-2: D6.2 L6.1 U6.1
IND3-3: D9.2 L9.1 U9.1
IND3-4: D12.2 L12.1 U12.1
IND3-5: D15.2 L15.1 U15.1
IND3-6: D18.2 L18.1 U18.1
IND3-7: D21.2 L21.1 U21.1
IND3-8: D24.2 L24.1 U24.1
IND3-9: D27.2 L27.1 U27.1
IND3-10: D30.2 L30.1 U30.1
IND3-11: D33.2 L33.1 U33.1
IND3-12: D36.2 L36.1 U36.1
IND3-13: D39.2 L39.1 U39.1
IND3-14: D42.2 L42.1 U42.1
IND3-15: D45.2 L45.1 U45.1
IND3-16: D48.2 L48.1 U48.1
N$1 [power]: C7.2 CH4.2 L5.2
N$2: C7.1 CH4.1 R4.2 U4.4
N$3 [power]: C9.2 CH5.2 L4.2
N$4: C9.1 CH5.1 R5.2 U5.4
N$5 [power]: C1.2 CH1.2 L1.2
N$6 [power]: C12.2 CH6.2 L6.2
N$7: C12.1 CH6.1 R6.2 U6.4
N$8 [power]: C13.2 CH7.2 L8.2
N$9 [power]: C3.2 CH2.2 L2.2
N$10: C13.1 CH7.1 R7.2 U7.4
N$11: C1.1 CH1.1 R1.2 U1.4
N$12 [power]: C15.2 CH8.2 L7.2
N$13: C3.1 CH2.1 R2.2 U2.4
N$14: C15.1 CH8.1 R8.2 U8.4
N$15 [power]: C18.2 CH9.2 L9.2
N$16 [power]: C5.2 CH3.2 L3.2
N$17: C18.1 CH9.1 R9.2 U9.4
N$18: C5.1 CH3.1 R3.2 U3.4
N$19 [power]: C19.2 CH10.2 L11.2
N$20: C19.1 CH10.1 R10.2 U10.4
N$21 [power]: C21.2 CH11.2 L10.2
N$22: C21.1 CH11.1 R11.2 U11.4
N$23 [power]: C24.2 CH12.2 L12.2
N$24: C24.1 CH12.1 R12.2 U12.4
N$25 [power]: C25.2 CH13.2 L14.2
N$26: C25.1 CH13.1 R13.2 U13.4
N$27 [power]: C27.2 CH14.2 L13.2
N$28: C27.1 CH14.1 R14.2 U14.4
N$29 [power]: C30.2 CH15.2 L15.2
N$30: C30.1 CH15.1 R15.2 U15.4
N$31 [power]: C31.2 CH16.2 L17.2
N$32: C31.1 CH16.1 R16.2 U16.4
N$33 [power]: C33.2 CH17.2 L16.2
N$34: C33.1 CH17.1 R17.2 U17.4
N$35 [power]: C36.2 CH18.2 L18.2
N$36: C36.1 CH18.1 R18.2 U18.4
N$37 [power]: C37.2 CH19.2 L20.2
N$38: C37.1 CH19.1 R19.2 U19.4
N$39 [power]: C39.2 CH20.2 L19.2
N$40: C39.1 CH20.1 R20.2 U20.4
N$41 [power]: C42.2 CH21.2 L21.2
N$42: C42.1 CH21.1 R21.2 U21.4
N$43 [power]: C43.2 CH22.2 L23.2
N$44: C43.1 CH22.1 R22.2 U22.4
N$45 [power]: C45.2 CH23.2 L22.2
N$46: C45.1 CH23.1 R23.2 U23.4
N$47 [power]: C48.2 CH24.2 L24.2
N$48: C48.1 CH24.1 R24.2 U24.4
N$49 [power]: C49.2 CH25.2 L26.2
N$50: C49.1 CH25.1 R25.2 U25.4
N$51 [power]: C51.2 CH26.2 L25.2
N$52: C51.1 CH26.1 R26.2 U26.4
N$53 [power]: C54.2 CH27.2 L27.2
N$54: C54.1 CH27.1 R27.2 U27.4
N$55 [power]: C55.2 CH28.2 L29.2
N$56: C55.1 CH28.1 R28.2 U28.4
N$57 [power]: C57.2 CH29.2 L28.2
N$58: C57.1 CH29.1 R29.2 U29.4
N$59 [power]: C60.2 CH30.2 L30.2
N$60: C60.1 CH30.1 R30.2 U30.4
N$61 [power]: C61.2 CH31.2 L32.2
N$62: C61.1 CH31.1 R31.2 U31.4
N$63 [power]: C63.2 CH32.2 L31.2
N$64: C63.1 CH32.1 R32.2 U32.4
N$65 [power]: C66.2 CH33.2 L33.2
N$66: C66.1 CH33.1 R33.2 U33.4
N$67 [power]: C67.2 CH34.2 L35.2
N$68: C67.1 CH34.1 R34.2 U34.4
N$69 [power]: C69.2 CH35.2 L34.2
N$70: C69.1 CH35.1 R35.2 U35.4
N$71 [power]: C72.2 CH36.2 L36.2
N$72: C72.1 CH36.1 R36.2 U36.4
N$73 [power]: C73.2 CH37.2 L38.2
N$74: C73.1 CH37.1 R37.2 U37.4
N$75 [power]: C75.2 CH38.2 L37.2
N$76: C75.1 CH38.1 R38.2 U38.4
N$77 [power]: C78.2 CH39.2 L39.2
N$78: C78.1 CH39.1 R39.2 U39.4
N$79 [power]: C79.2 CH40.2 L41.2
N$80: C79.1 CH40.1 R40.2 U40.4
N$81 [power]: C81.2 CH41.2 L40.2
N$82: C81.1 CH41.1 R41.2 U41.4
N$83 [power]: C84.2 CH42.2 L42.2
N$84: C84.1 CH42.1 R42.2 U42.4
N$85 [power]: C85.2 CH43.2 L44.2
N$86: C85.1 CH43.1 R43.2 U43.4
N$87 [power]: C87.2 CH44.2 L43.2
N$88: C87.1 CH44.1 R44.2 U44.4
N$89 [power]: C90.2 CH45.2 L45.2
N$90: C90.1 CH45.1 R45.2 U45.4
N$91 [power]: C91.2 CH46.2 L47.2
N$92: C91.1 CH46.1 R46.2 U46.4
N$93 [power]: C93.2 CH47.2 L46.2
N$94: C93.1 CH47.1 R47.2 U47.4
N$95 [power]: C96.2 CH48.2 L48.2
N$96: C96.1 CH48.1 R48.2 U48.4
VIN: C2.1 C4.1 C6.1 D1.1 D2.1 D3.1 JP2.2 R1.1 R2.1 R3.1 U1.5 U2.5 U3.5
VIN1: C8.1 C10.1 C11.1 D4.1 D5.1 D6.1 JP1.2 R4.1 R5.1 R6.1 U4.5 U5.5 U6.5
VIN2: C14.1 C16.1 C17.1 D7.1 D8.1 D9.1 JP7.2 R7.1 R8.1 R9.1 U7.5 U8.5 U9.5
VIN3: C20.1 C22.1 C23.1 D10.1 D11.1 D12.1 JP10.2 R10.1 R11.1 R12.1 U10.5 U11.5 U12.5
VIN4: C26.1 C28.1 C29.1 D13.1 D14.1 D15.1 JP13.2 R13.1 R14.1 R15.1 U13.5 U14.5 U15.5
VIN5: C32.1 C34.1 C35.1 D16.1 D17.1 D18.1 JP16.2 R16.1 R17.1 R18.1 U16.5 U17.5 U18.5
VIN6: C38.1 C40.1 C41.1 D19.1 D20.1 D21.1 JP19.2 R19.1 R20.1 R21.1 U19.5 U20.5 U21.5
VIN7: C44.1 C46.1 C47.1 D22.1 D23.1 D24.1 JP22.2 R22.1 R23.1 R24.1 U22.5 U23.5 U24.5
VIN8: C50.1 C52.1 C53.1 D25.1 D26.1 D27.1 JP25.2 R25.1 R26.1 R27.1 U25.5 U26.5 U27.5
VIN9: C56.1 C58.1 C59.1 D28.1 D29.1 D30.1 JP28.2 R28.1 R29.1 R30.1 U28.5 U29.5 U30.5
VIN10: C62.1 C64.1 C65.1 D31.1 D32.1 D33.1 JP31.2 R31.1 R32.1 R33.1 U31.5 U32.5 U33.5
VIN11: C68.1 C70.1 C71.1 D34.1 D35.1 D36.1 JP34.2 R34.1 R35.1 R36.1 U34.5 U35.5 U36.5
VIN12: C74.1 C76.1 C77.1 D37.1 D38.1 D39.1 JP37.2 R37.1 R38.1 R39.1 U37.5 U38.5 U39.5
VIN13: C80.1 C82.1 C83.1 D40.1 D41.1 D42.1 JP40.2 R40.1 R41.1 R42.1 U40.5 U41.5 U42.5
VIN14: C86.1 C88.1 C89.1 D43.1 D44.1 D45.1 JP43.2 R43.1 R44.1 R45.1 U43.5 U44.5 U45.5
VIN15: C92.1 C94.1 C95.1 D46.1 D47.1 D48.1 JP46.2 R46.1 R47.1 R48.1 U46.5 U47.5 U48.5